# Altium PCB HS0038_BOARD.PcbDoc
Units mm, origin at the board's own origin, x right, y up, seen from the top; angles counter-clockwise.
Board outline 85 x 85 mm, 2 copper layers (Top Layer, Bottom Layer); 57 components, 50 nets, 262 pads, 40 vias.
Unrouted connection lines stored in the file: 1.
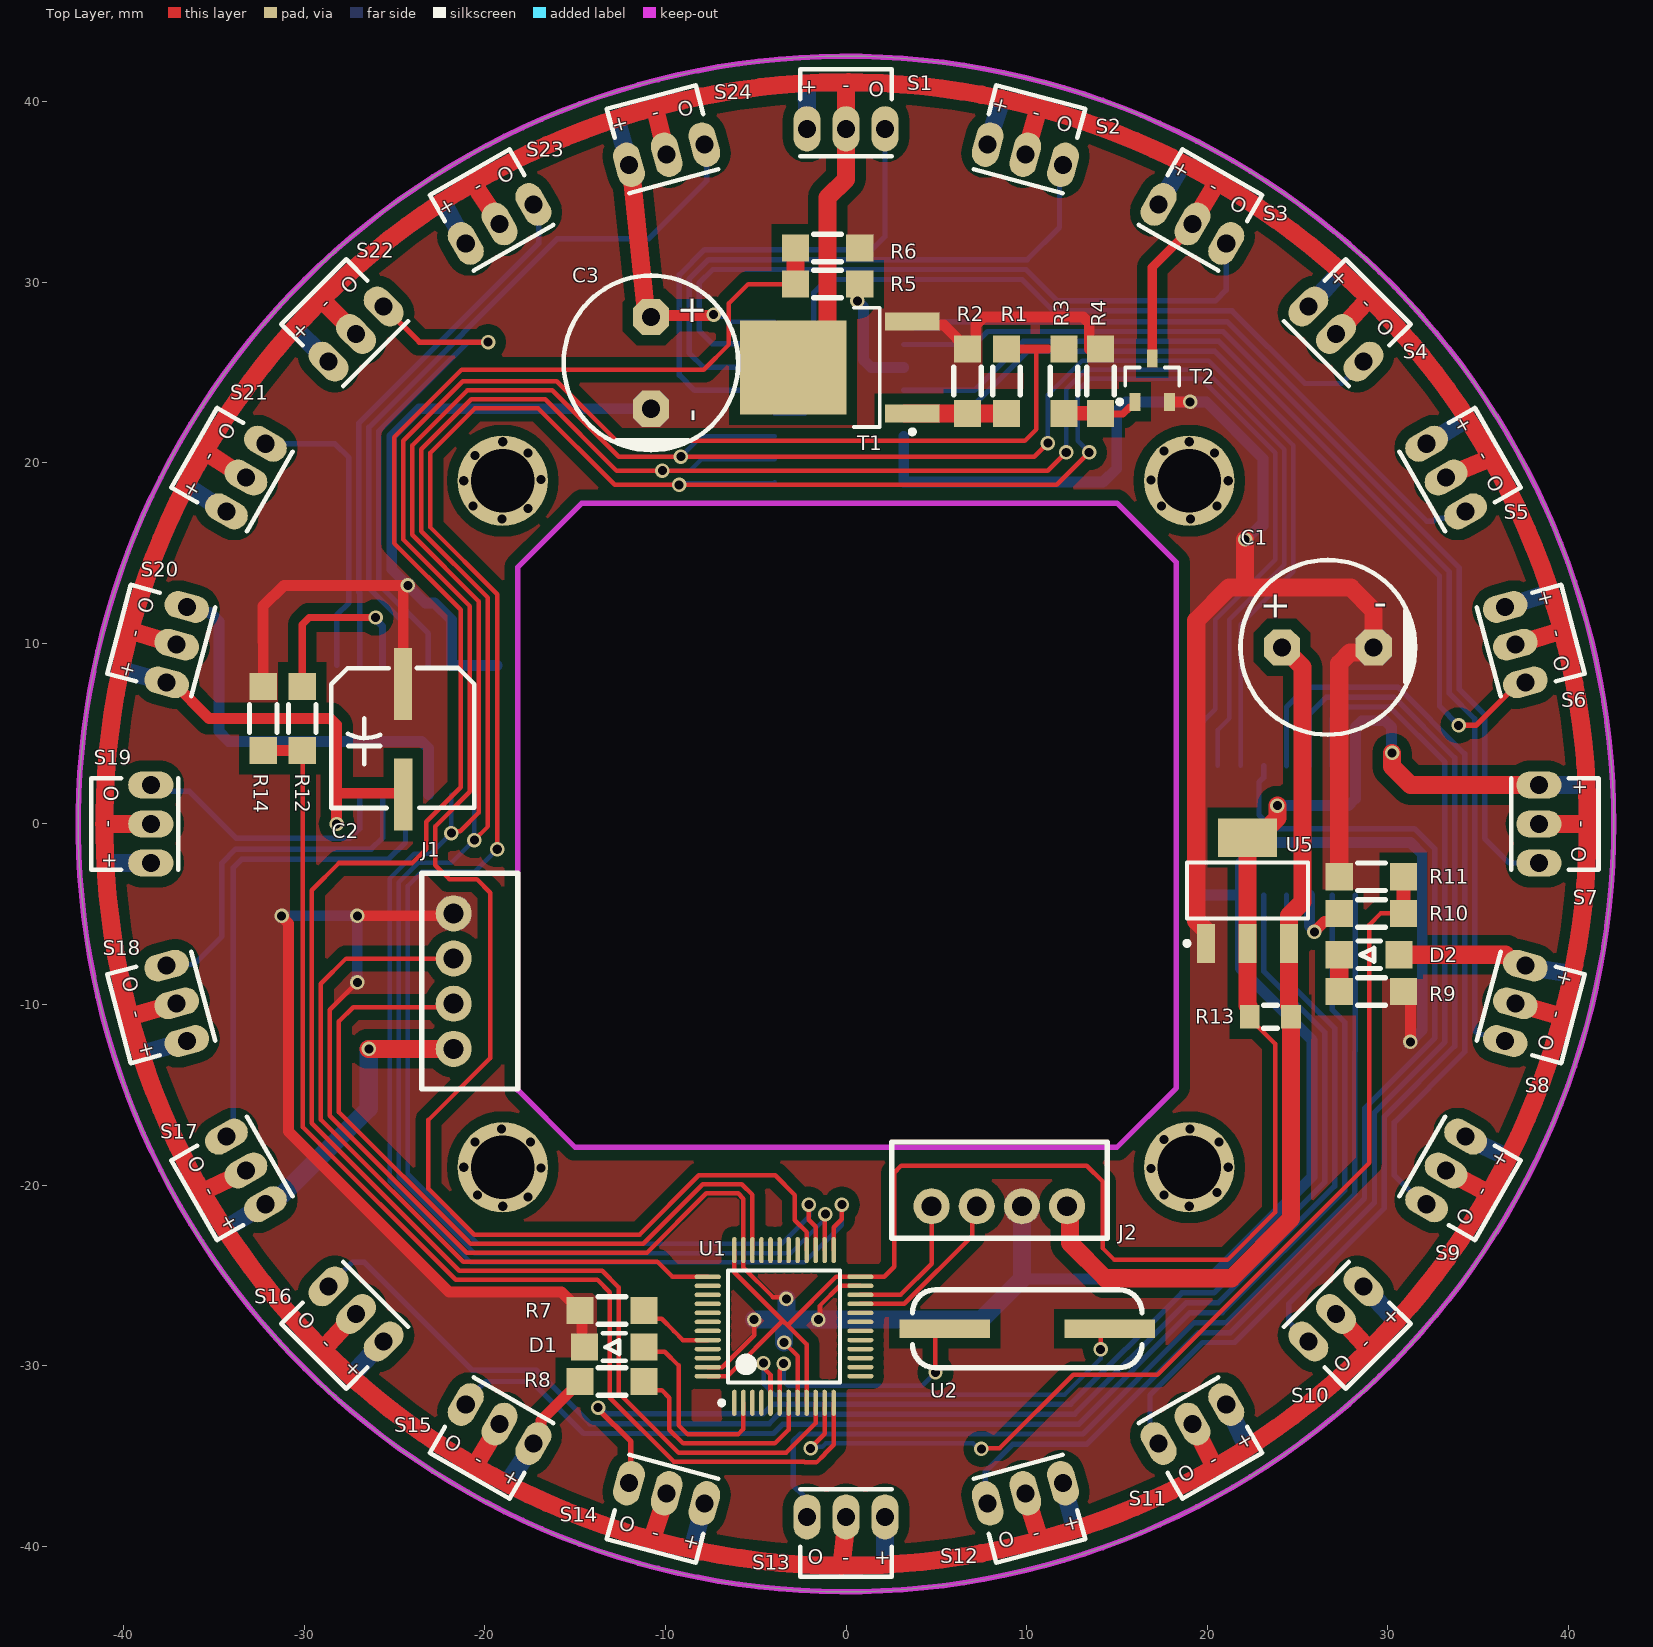
[diagram p0: Top Layer view]
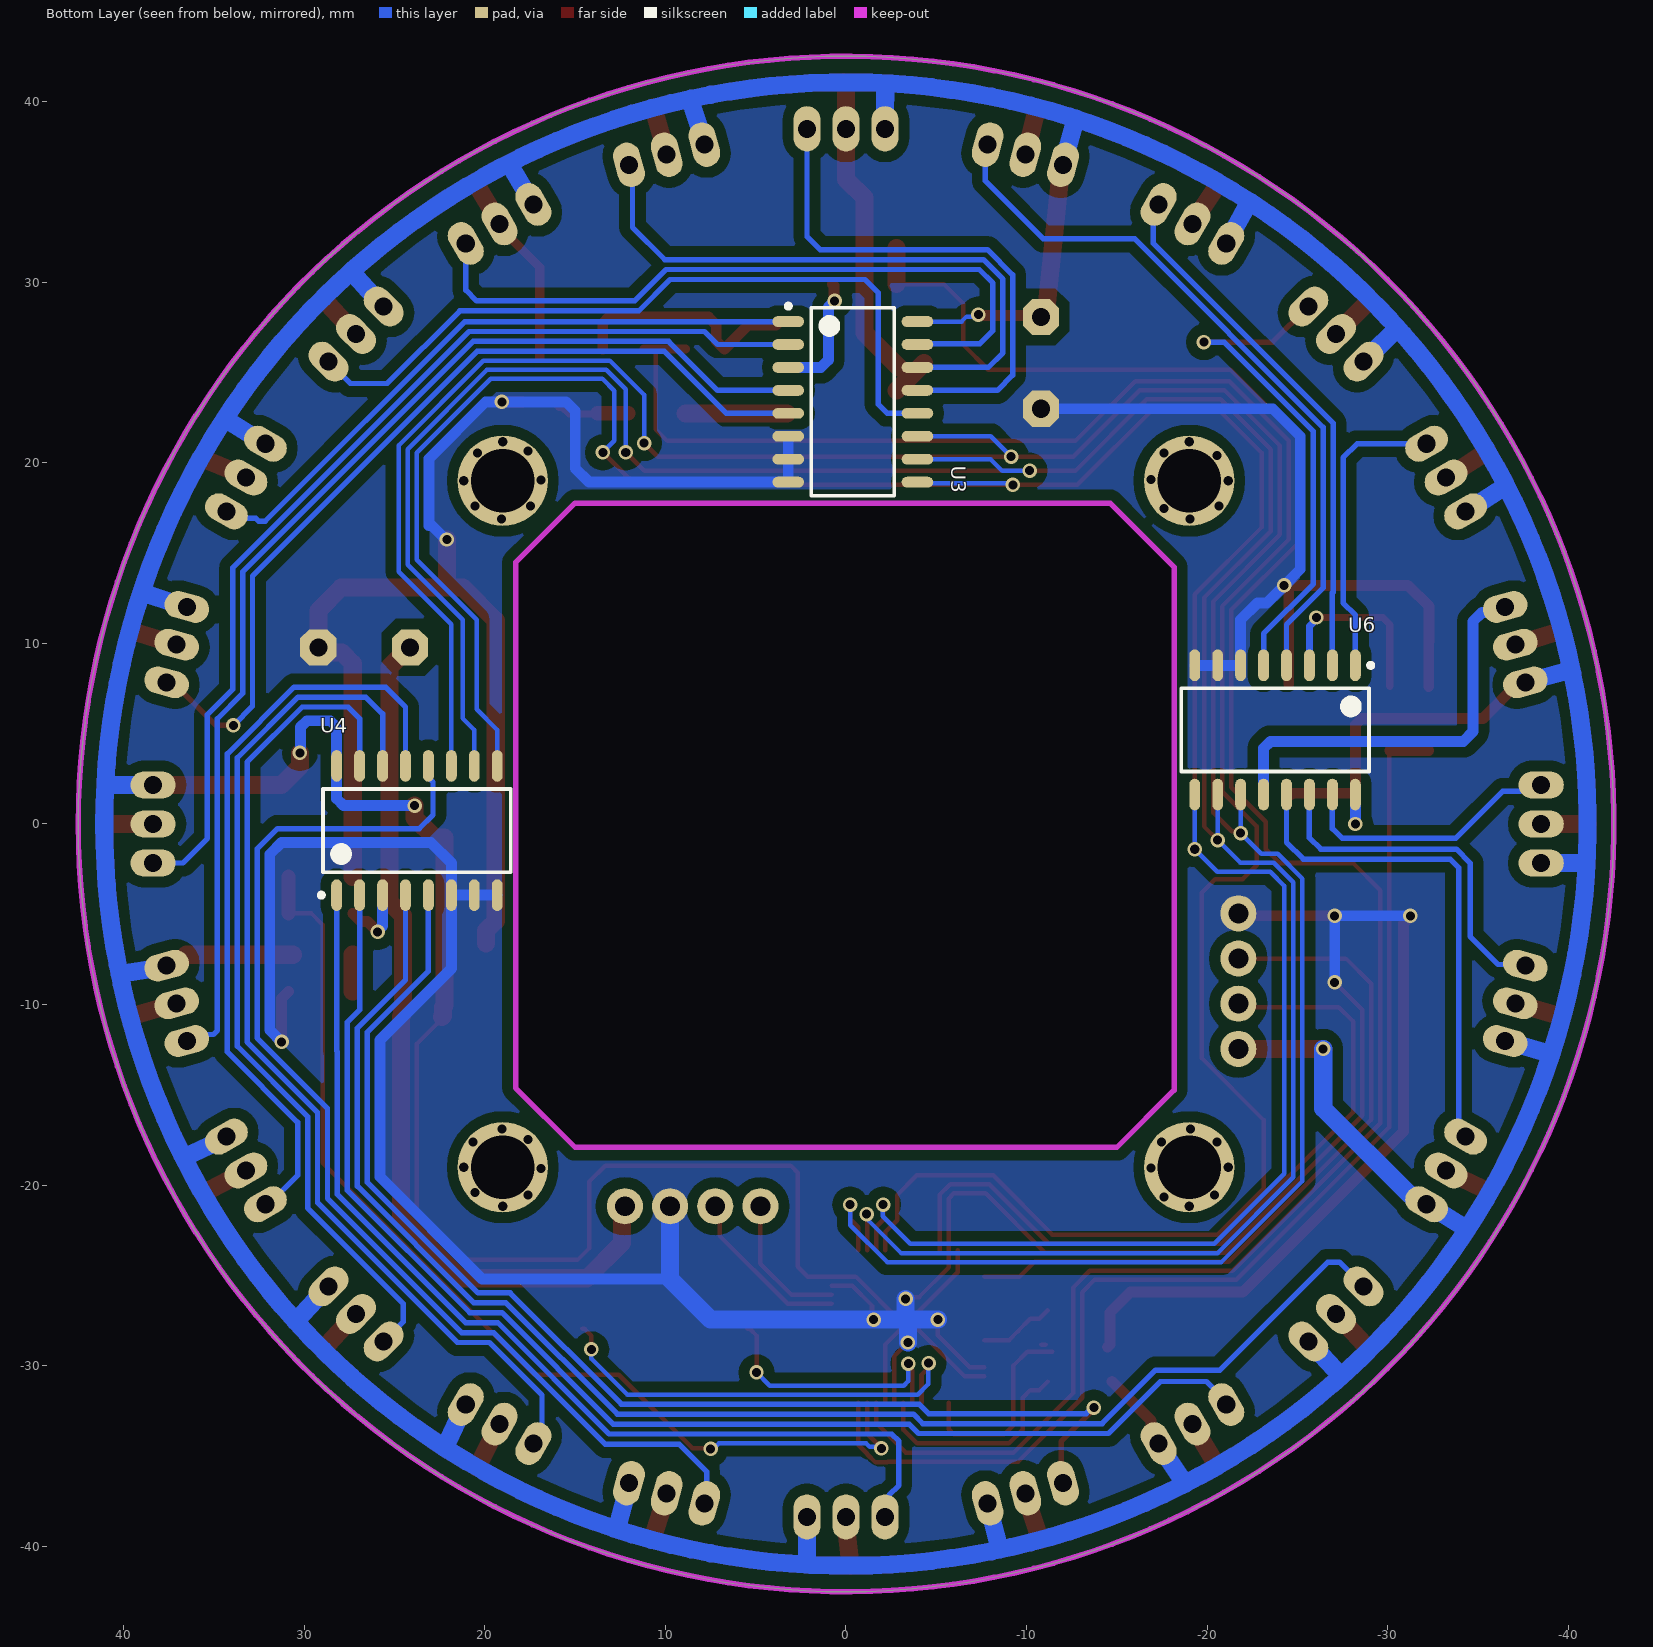
[diagram p1: Bottom Layer view, seen from below]
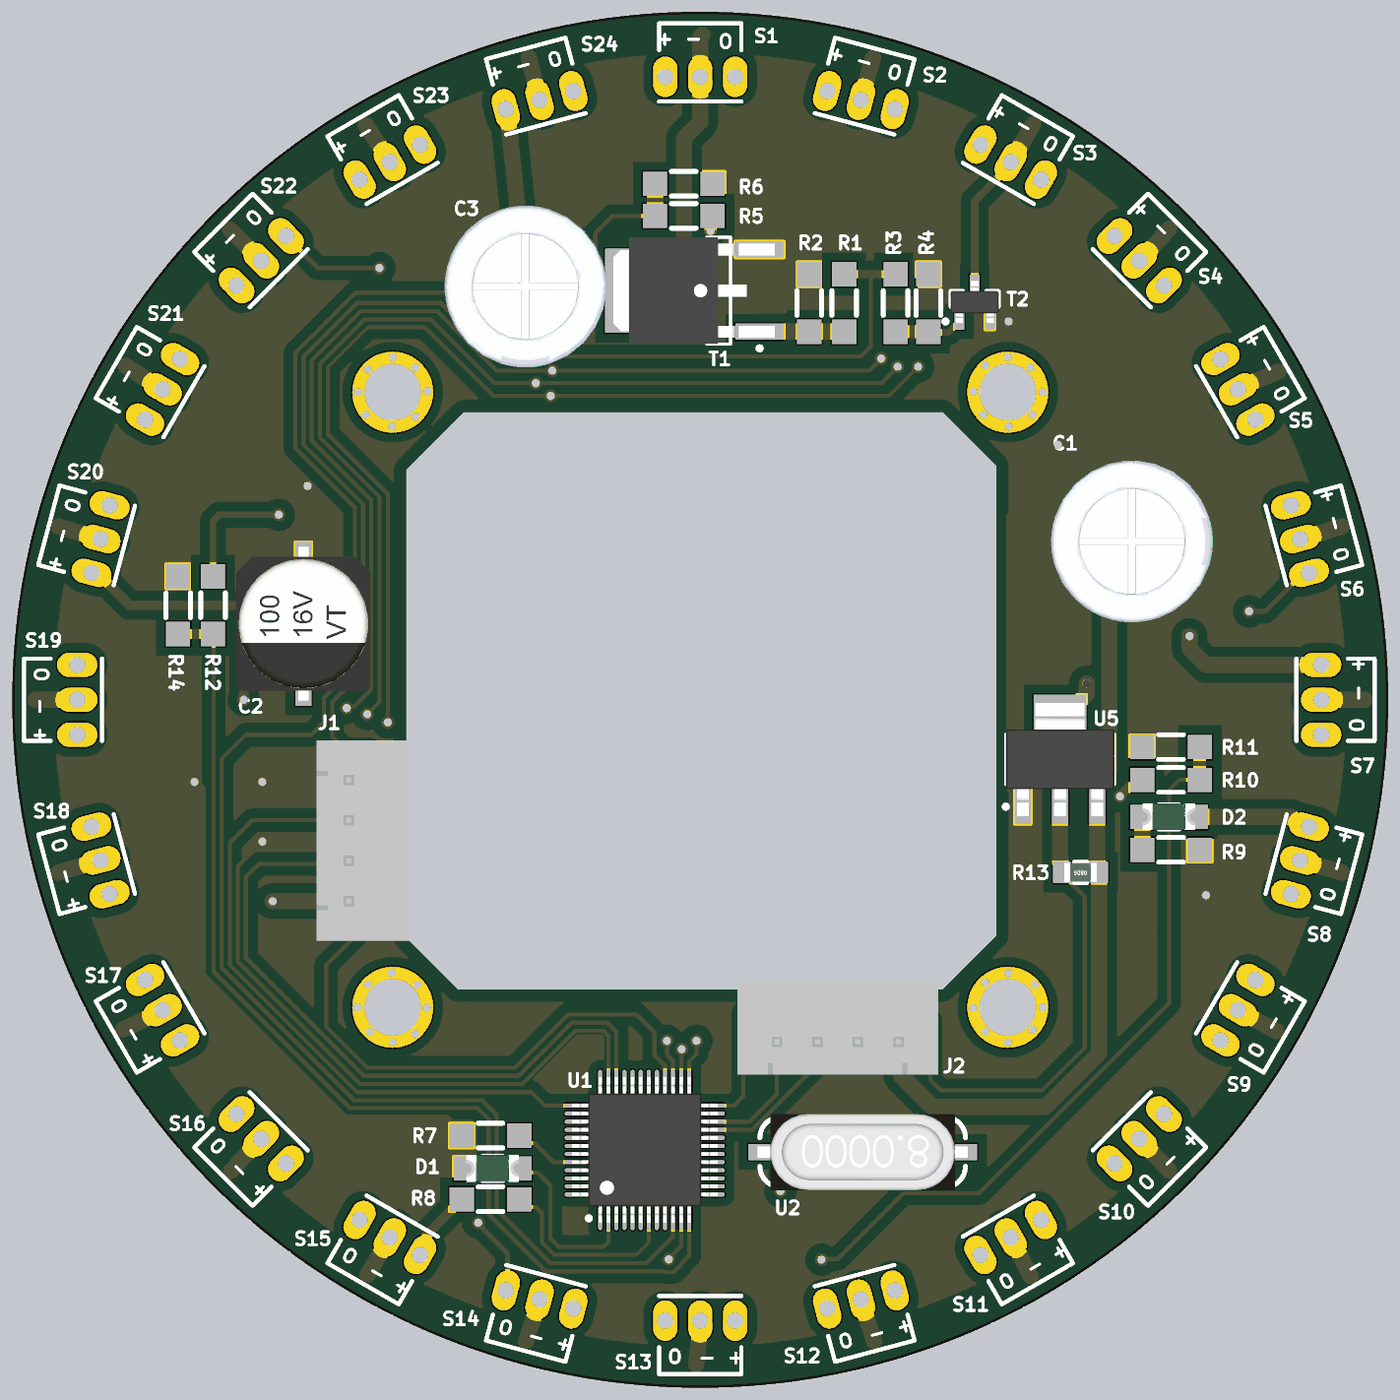
[diagram p2: 3D render of the assembled board from above, using the file's embedded part models]
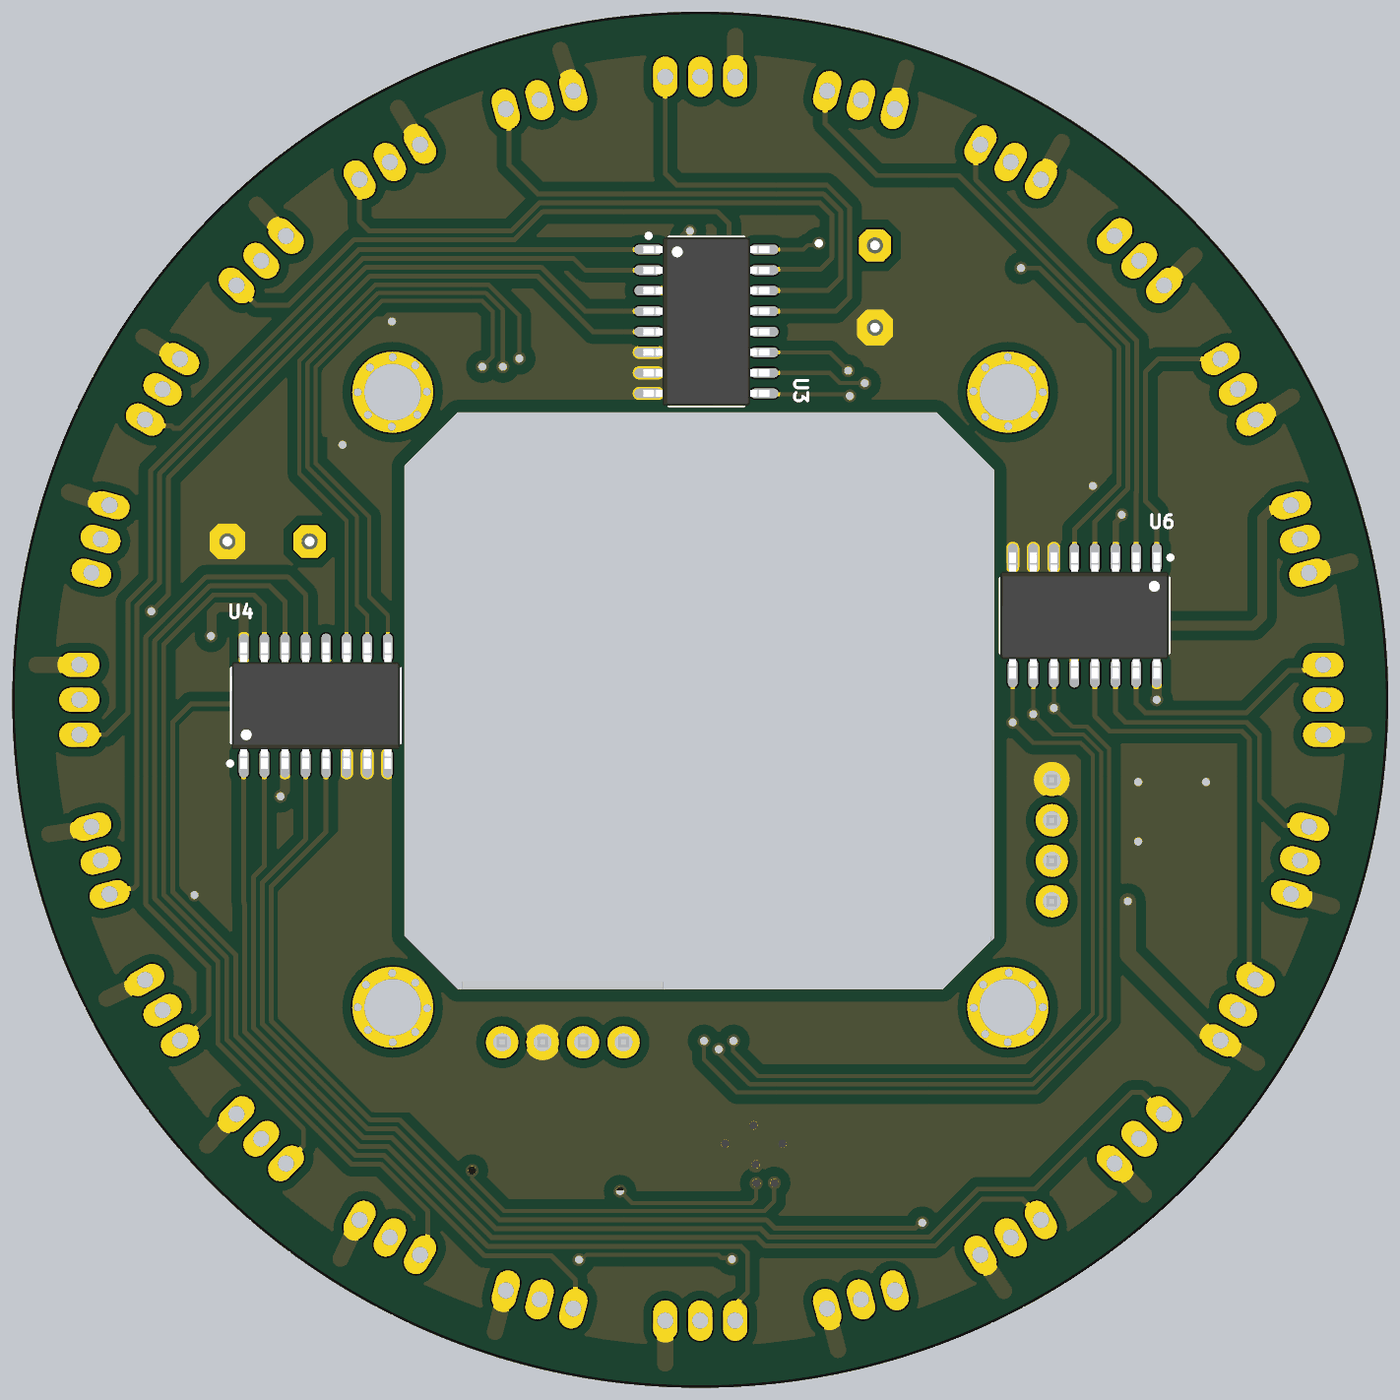
[diagram p3: 3D render of the assembled board from below, using the file's embedded part models]

## Layer stack, top to bottom
Top Solder: solder mask 0.0102, Solder Resist, Dk 3.5
Top Layer: signal copper 0.0356
Dielectric 1: dielectric 0.32, FR-4, Dk 4.8
Bottom Layer: signal copper 0.0356
Bottom Solder: solder mask 0.0102, Solder Resist, Dk 3.5

## Board outline
-42.5,0 ccw(c0,0) 0,-42.5 ccw(c0,0) 42.5,0 ccw(c0,0) 0,42.5 ccw(c0,0)
cut-out: -18.161,-14.732 -15,-17.893 15,-17.893 17.893,-15 18.288,-14.605 18.288,14.478 17.766,15 15,17.766 -14.619,17.766 -18.161,14.224

## Design rules (kind name [scope] priority, off if disabled: settings)
Clearance [All] p1: gap=0.6 ignorepadtopadclearanceinfootprint=FALSE except(0: Arc-Hole Track-Hole SMDPad-Hole THPad-Hole Via-Hole Fill-Hole Poly-Hole Region-Hole Text-Hole; 0.25: Arc-Arc Arc-Track Arc-SMDPad Arc-Via Track-Track Track-SMDPad Track-Via SMDPad-SMDPad SMDPad-Via THPad-Via Via-Via; 0.254: Arc-THPad Arc-Text Track-THPad Track-Text SMDPad-THPad SMDPad-Text THPad-THPad THPad-Text Via-Text Fill-Text Poly-Text Region-Text Text-Text)
PlaneConnect [All] p1: planeconnectstyle=Direct reliefexpansion=0.508 reliefentries=4 reliefconductorwidth=0.254 reliefairgap=0.254
PolygonConnect [All] p1: connectstyle=Direct reliefconductorwidth=0.254 reliefentries=4 polygonreliefangle="90 Angle" airgapwidth=0.254
RoutingVias [All] p1: holewidth=0.5 width=0.8 viastyle="Through Hole" minholewidth=0.5 minwidth=0.8 maxholewidth=0.6 maxwidth=1
SolderMaskExpansion [All] p1: expansion=0.102 istentingtop=FALSE
Width [All] p1: maxlimit=10 minlimit=0.25 preferedwidth=0.3
29 further rules are at their usual default settings.

## Classes and differential pairs
component class HS0038_BOARD: U6

## Components (designator, comment, footprint, x,y, rotation, side; value= is the part's Value field where it differs from the comment)
C1 "1000uF" "CAP 5x10x13 black" 26.67,9.779 r180 top
C2 "CAP" "CAP SMD 100uF 16V" -24.511,4.699 r270 top
C3 "1000uF" "CAP 5x10x13 black" -10.795,25.527 r90 top
D1 "LED" "LED GREEN 1206" -12.827,-28.956 r180 top
D2 "LED" "LED GREEN 1206" 28.956,-7.239 r180 top
J1 "XH4" "XH 4PIN" -20.828,-8.699 r270 top
J2 "XH4" "XH 4PIN" 8.492,-20.27 r0 top
R1 "RES" RES1206 8.89,24.511 r90 top
R2 "RES" RES1206 6.731,24.511 r90 top
R3 "RES" RES1206 12.065,24.511 r90 top
R4 "RES" RES1206 14.097,24.511 r90 top
R5 "RES" RES1206 -1.016,29.885 r0 top
R6 "RES" RES1206 -1.016,31.877 r180 top
R7 "RES" RES1206 -12.954,-26.924 r0 top
R8 "RES" RES1206 -12.954,-30.861 r0 top
R9 "RES" RES1206 29.083,-9.271 r0 top
R10 "RES" RES1206 29.083,-4.953 r180 top
R11 "RES" RES1206 29.083,-2.921 r0 top
R12 "RES" RES1206 -30.099,5.842 r90 top
R13 "RES" RES805 23.495,-10.668 r180 top
R14 "RES" RES1206 -32.258,5.842 r270 top
S1 "TSOP" TSOP 0,38.481 r180 top locked
S2 "TSOP" TSOP 9.927,37.047 r165 top locked
S3 "TSOP" TSOP 19.177,33.216 r150 top locked
S4 "TSOP" TSOP 27.121,27.121 r135 top locked
S5 "TSOP" TSOP 33.216,19.177 r120 top locked
S6 "TSOP" TSOP 37.047,9.927 r105 top locked
S7 "TSOP" TSOP 38.354,0 r90 top locked
S8 "TSOP" TSOP 37.047,-9.927 r75 top locked
S9 "TSOP" TSOP 33.216,-19.177 r60 top locked
S10 "TSOP" TSOP 27.121,-27.121 r45 top locked
S11 "TSOP" TSOP 19.177,-33.216 r30 top locked
S12 "TSOP" TSOP 9.927,-37.047 r15 top locked
S13 "TSOP" TSOP 0,-38.354 r0 top locked
S14 "TSOP" TSOP -9.927,-37.047 r345 top locked
S15 "TSOP" TSOP -19.177,-33.216 r330 top locked
S16 "TSOP" TSOP -27.121,-27.121 r315 top locked
S17 "TSOP" TSOP -33.216,-19.177 r300 top locked
S18 "TSOP" TSOP -37.047,-9.927 r285 top locked
S19 "TSOP" TSOP -38.481,0 r270 top locked
S20 "TSOP" TSOP -37.047,9.927 r255 top locked
S21 "TSOP" TSOP -33.216,19.177 r240 top locked
S22 "TSOP" TSOP -27.121,27.121 r225 top locked
S23 "TSOP" TSOP -19.177,33.216 r210 top locked
S24 "TSOP" TSOP -9.927,37.047 r195 top locked
T1 "FDD" FDD6690A -0.381,25.273 r180 top
T2 "AO3400A" AO3400A 16.952,24.568 r90 top
U1 "STM32F103C8T6" STM32F103C8T6 -3.429,-27.813 r90 top
U2 "Oscilator" "Crystal Oscilator" 10.033,-27.94 r180 top
U3 "MUX8" "4051 SMD" -0.381,23.368 r180 bottom
U4 "MUX8" "4051 SMD" 23.749,-0.362 r90 bottom
U5 "1117" AMS1117 22.225,-3.683 r90 top
U6 "MUX8" "4051 MUX8" -23.749,5.207 r270 bottom
? "Comment" SCREW -19,-19 r90 top
? "Comment" SCREW 19,-19 r180 top
? "Comment" SCREW 19,19 r270 top
? "Comment" SCREW -19,19 r0 top

## Footprints (in the part's own frame and the unit in brackets; to place one, negate y for a bottom-side part, rotate by r counter-clockwise, add the part's x,y. Pads: shape width x height; smd on the part's side, far side on the other; paste and mask are expansions set on the pad)
"4051 MUX8" [mm] "SOP, 16-Leads, Body 10.20x5.30mm, Pitch 1.27mm, IPC Medium Density"
  oval 1.75x0.6 smd: 1(-3.575,4.445) 2(-3.575,3.175) 3(-3.575,1.905) 4(-3.575,0.635) 5(-3.575,-0.635) 6(-3.575,-1.905) 7(-3.575,-3.175) 8(-3.575,-4.445) 9(3.575,-4.445) 10(3.575,-3.175) 11(3.575,-1.905) 12(3.575,-0.635) 13(3.575,0.635) 14(3.575,1.905) 15(3.575,3.175) 16(3.575,4.445)
  silkscreen extent -3.7,-5.2 2.3,5.42, body extent -3.9,-5.2 3.9,5.2, height 2
"4051 SMD" [mm] "SOP, 16-Leads, Body 10.20x5.30mm, Pitch 1.27mm, IPC Medium Density"
  oval 1.75x0.6 smd: 1(-3.575,4.445) 2(-3.575,3.175) 3(-3.575,1.905) 4(-3.575,0.635) 5(-3.575,-0.635) 6(-3.575,-1.905) 7(-3.575,-3.175) 8(-3.575,-4.445) 9(3.575,-4.445) 10(3.575,-3.175) 11(3.575,-1.905) 12(3.575,-0.635) 13(3.575,0.635) 14(3.575,1.905) 15(3.575,3.175) 16(3.575,4.445)
  silkscreen extent -3.7,-5.2 2.3,5.42, body extent -3.9,-5.2 3.9,5.2, height 2
AMS1117 [mm] "SOT223, 4-Leads, Body 6.30x7.00mm (avg), Pitch 2.30mm, IPC Medium Density"
  rect 2.15x1 smd: 1(-2.925,2.3) 2(-2.925,0) 3(-2.925,-2.3)
  rect 2.15x3.25 smd: 4(2.925,0)
  silkscreen extent -3.05,-3.35 1.55,3.47, body extent -3.5,-3.35 3.5,3.35, height 1.65
AO3400A [mm] "SOT23, 3-Leads, Body 2.90x2.45mm, Pitch 0.95mm, IPC Medium Density"
  rect 1x0.6 smd: 1(-1.2,0.95) 2(-1.2,-0.95) 3(1.2,0)
  silkscreen extent -1.32,-1.5 0.7,1.92, body extent -1.3,-1.5 1.3,1.5, height 1.1
"CAP 5x10x13 black" [mm]
  oct 2x2 hole 1: 1(-2.54,0) 2(2.54,0)
  silkscreen extent -4.83,-4.83 4.83,4.83, body extent -5,-5 5,5, height 13.1
"CAP SMD 100uF 16V" [mm]
  rect 4x1 smd: 1(-3.048,0) 2(3.07,0.003)
  silkscreen extent -3.94,-3.97 3.81,3.94, body extent -4.75,-4.15 4.75,4.15, height 10.51
"Crystal Oscilator" [mm]
  rect 5x1 smd: 1(-4.572,0) 2(4.572,0)
  silkscreen extent -6.35,-2.16 6.35,2.16, body extent -6.5,-2.35 6.5,2.35, height 4.21
FDD6690A [mm] "D-PAK, 3-Pads, Body 5.85x6.66mm (max), IPC Medium Density"
  rect 3x1 smd: 1(-4.05,2.54) 3(-4.05,-2.54)
  rect 5.9x5.2 smd: 4(2.55,0)
  silkscreen extent -4.18,-3.3 -0.8,3.69, body extent -5,-3.3 5,3.3, height 3.03
"LED GREEN 1206" [mm]
  rect 1.5x1.5 smd: 1(-1.651,0) 2(1.651,0)
  silkscreen extent -0.64,-0.76 0.64,0.76, body extent -1.63,-0.83 1.64,0.82, height 0.9
RES805 [mm]
  rect 1.1x1.3 smd: 1(-1.143,0) 2(1.143,0)
  silkscreen extent -0.39,-0.64 0.38,0.64, body extent -1,-0.6 1,0.6, height 0.48
RES1206 [mm]
  rect 1.5x1.5 smd: 1(-1.778,0) 2(1.778,0)
  silkscreen extent -0.76,-0.76 0.76,0.76, body extent -1.58,-0.82 1.58,0.82, height 0.53
SCREW [mm]
  round 5 hole 3.5: 1(0,0)
  round 0 hole 0.5: ""(-2.159,0) ""(-1.651,-1.397) ""(-1.524,1.397) ""(-0.031,-2.11) ""(0,2.159) ""(1.397,1.524) ""(1.397,-1.524) ""(2.128,0.059)
STM32F103C8T6 [mm] "TSQFP, 48-Leads, Body 7.00x7.00mm, Pitch 0.50mm, IPC Medium Density"
  oval 1.45x0.25 smd: 1(-4.225,2.75) 2(-4.225,2.25) 3(-4.225,1.75) 4(-4.225,1.25) 5(-4.225,0.75) 6(-4.225,0.25) 7(-4.225,-0.25) 8(-4.225,-0.75) 9(-4.225,-1.25) 10(-4.225,-1.75) 11(-4.225,-2.25) 12(-4.225,-2.75) 25(4.225,-2.75) 26(4.225,-2.25) 27(4.225,-1.75) 28(4.225,-1.25) 29(4.225,-0.75) 30(4.225,-0.25) 31(4.225,0.25) 32(4.225,0.75) 33(4.225,1.25) 34(4.225,1.75) 35(4.225,2.25) 36(4.225,2.752)
  oval 0.25x1.45 smd: 13(-2.75,-4.225) 14(-2.25,-4.225) 15(-1.75,-4.225) 16(-1.25,-4.225) 17(-0.75,-4.225) 18(-0.25,-4.225) 19(0.25,-4.225) 20(0.75,-4.225) 21(1.25,-4.225) 22(1.75,-4.225) 23(2.25,-4.225) 24(2.75,-4.225) 37(2.75,4.225) 38(2.25,4.225) 39(1.75,4.225) 40(1.25,4.225) 41(0.75,4.225) 42(0.25,4.225) 43(-0.25,4.225) 44(-0.75,4.225) 45(-1.25,4.225) 46(-1.75,4.225) 47(-2.25,4.225) 48(-2.75,4.225)
  silkscreen extent -4.35,-3.1 3.1,3.57, body extent -4.5,-4.5 4.5,4.5, height 1.6
TSOP [mm]
  oval 1.5x2.5 hole 1: 1(-2.159,0) 2(0,0) 3(2.159,0)
  silkscreen extent -2.54,-3.3 2.54,1.52, body extent -2.54,-3.4 2.54,1.4, height 11
"XH 4PIN" [mm]
  round 2 hole 1.1: 1(-3.753,-0.889) 2(-1.253,-0.889) 3(1.247,-0.889) 4(3.747,-0.889)
  silkscreen extent -5.97,-2.67 5.97,2.67, body extent -6.2,-2.88 6.2,2.88, height 7

## Part data
C1 C3: library part "Cap Electrolyte", "CAP DIP"
C2: library part "CAP Electrolit SMD", "Capacitor Electrolit SMD"
D1 D2: library part "LED SMD 1206", "LED SMD 1206"
J1 J2: library part "XH 4PIN", "XH Connector 4pins"
R1 R2 R3 R4 R5 R6 R7 R8 R9 R10 R11 R12 R14: library part RES1206, "RESISTOR SMD"
R13: library part RES805, "RESISTOR SMD"
S1 S2 S3 S4 S5 S6 S7 S8 S9 S10 S11 S12 S13 S14 S15 S16 S17 S18 S19 S20 S21 S22 S23 S24: "IR Sensor"
T1: library part FDD6690A, "FDD6690A MOSFET N-Chanel"
U1: "STM32F103C8T6 / LQFP48"
U2: library part Crystal, "Crystal Oscilator 8MHz"
U3 U4: library part 4051, "MULTIPLEXER 8 BIT"
U5: library part AMS1117, "3.3v Regulator"
U6: library part "4051 MUX8", "8Bit multiplexer/demultiplexer"

## Via types
v1: diameter 0.8, hole 0.5, Top Layer to Bottom Layer, tented both sides, 40 vias

## Nets (pads, with @x,y where several pads share a name; then routed paths per layer and width w, separated by ;. In a path a pad name is that pad's centre, name@x,y a point inside that pad or via, vN(x,y) a via of type N, cw(c..) or ccw(c..) an arc to the next point about the centre after c; other vN are vias at no path point)
+5: C1.2 J2.4 R13.1 U5.3 | length 49
  Top Layer w1: J2.4 12.405,-21.325 12.405,-23.2 14.351,-25.146 21.336,-25.146 24.638,-21.844 R13.1 24.588,-10.618 24.588,-10.125 24.525,-10.062 24.525,-5.066 25.273,-4.318 25.273,8.693 24.187,9.779 C1.2
A: U1.27 U3.9 U4.9 U6.9 | length 157.1
  Top Layer w0.25: v1(-19.304,-1.397) -19.304,12.717 -23.003,16.416 -23.003,20.541 -20.541,23.003 -17.034,23.003 -12.801,18.77 v1(-9.239,18.77) 11.658,18.77 v1(13.462,20.574) ; v1(-2.055,-21.069) -2.055,-21.915 -1.679,-22.291 U1.27
  Bottom Layer w0.25: U6.9 v1(-19.304,-1.397) -20.558,-2.651 -23.479,-2.651 -24.257,-3.429 -24.257,-19.359 -20.375,-23.241 -3.556,-23.241 -2.032,-21.717 -2.032,-21.092 v1(-2.055,-21.069) ; v1(-9.239,18.77) -9.15,18.86 -4.02,18.86 U3.9 ; v1(13.462,20.574) 12.819,21.217 12.819,23.978 13.479,24.638 19.668,24.638 23.765,20.541 23.765,14.621 20.447,11.303 20.447,6.35 19.304,5.207 U4.9
ADC0: R5.1 R6.2 U1.10 | length 115
  Top Layer w0.25: R5.1 -5.421,29.885 -6.477,28.829 -6.477,26.543 -7.874,25.146 -21.281,25.146 -25.019,21.408 -25.019,15.549 -21.328,11.858 -21.328,2.04 -23.241,0.127 -23.241,-1.397 -24.003,-2.159 -28.067,-2.159 -29.567,-3.659 -29.567,-16.568 -21.402,-24.733 -13.494,-24.733 -12.573,-25.654 -12.573,-31.496 -9.271,-34.798 -3.317,-34.798 -1.679,-33.16 U1.10
  Top Layer w1: R5.1 R6.2
ADC1: R10.1 R11.2 U1.11 | length 57.9
  Top Layer w0.25: v1(-1.954,-34.565) -1.954,-34.531 -1.179,-33.756 U1.11 ; v1(7.493,-34.59) 7.539,-34.544 8.509,-34.544 12.573,-30.48 17.239,-30.48 28.956,-18.763 28.956,-5.588 29.591,-4.953 R10.1
  Top Layer w0.8: R10.1 R11.2
  Bottom Layer w0.25: v1(-1.954,-34.565) -1.871,-34.482 -1.313,-34.482 -1.121,-34.29 7.044,-34.29 7.344,-34.59 v1(7.493,-34.59)
ADC2: R12.1 R14.2 U1.12 | length 66.3
  Top Layer w0.25: R12.1 -30.067,4.032 -30.067,-16.776 -21.61,-25.233 -13.756,-25.233 -13.073,-25.916 -13.073,-31.758 -9.525,-35.306 -2.309,-35.306 -2.275,-35.34 -1.633,-35.34 -1.179,-34.886 -1.179,-34.852 -0.679,-34.352 U1.12
  Top Layer w0.6: R14.2 R12.1
B: U1.26 U3.10 U4.10 U6.10 | length 158.1
  Top Layer w0.25: v1(-20.574,-0.889) -19.82,-0.135 -19.82,12.526 -23.503,16.209 -23.503,20.748 -20.748,23.503 -16.645,23.503 -12.7,19.558 v1(-10.16,19.558) 11.176,19.558 v1(12.192,20.574) ; U1.26 -1.179,-21.626 v1(-1.143,-21.59)
  Bottom Layer w0.25: U6.10 v1(-20.574,-0.889) -21.836,-2.151 -23.686,-2.151 -24.765,-3.23 -24.765,-19.558 -20.574,-23.749 -3.048,-23.749 -1.248,-21.949 -1.248,-21.695 v1(-1.143,-21.59) ; v1(-10.16,19.558) -8.636,19.558 -8.001,20.193 U3.10 ; v1(12.192,20.574) 12.192,24.058 13.272,25.138 19.875,25.138 24.265,20.748 24.265,14.359 21.209,11.303 21.209,5.842 20.574,5.207 U4.10
BOOT0: R7.2 U1.44 | length 4.2
  Top Layer w0.25: R7.2 -10.705,-27.395 -10.197,-27.395 -9.525,-28.067 -9.029,-28.563 U1.44
C: U1.25 U3.11 U4.11 U6.11 | length 160.6
  Top Layer w0.25: v1(-21.844,-0.508) -21.739,-0.403 -21.358,-0.403 -20.32,0.635 -20.32,12.319 -24.003,16.002 -24.003,20.955 -20.955,24.003 -16.256,24.003 -12.586,20.333 10.427,20.333 v1(11.176,21.082) ; U1.25 -0.679,-22.327 -0.231,-21.879 v1(-0.231,-21.069)
  Bottom Layer w0.25: U6.11 v1(-21.844,-0.508) -22.987,-1.651 -23.893,-1.651 -25.265,-3.023 -25.265,-19.765 -20.781,-24.249 -2.278,-24.249 -0.231,-22.202 v1(-0.231,-21.069) ; v1(-9.144,20.333) -8.014,21.463 U3.11 ; v1(11.176,21.082) 11.176,23.749 13.065,25.638 20.082,25.638 24.765,20.955 24.765,13.97 21.844,11.049 U4.11
GND: C1.1 C2.1 C3.1 D1.2 J1.1 J2.3 R2.2 R4.2 R6.1 R7.1 R9.2 R11.1 R14.1 T1.3 T2.2 U1.8 U1.23 U1.35 U1.47 U3.6 U3.7 U3.8 U4.6 U4.7 U4.8 U5.1 U6.6 U6.7 U6.8 | length 332.8
  Top Layer w0.25: v1(-27.051,-8.763) -28.567,-10.279 -28.567,-16.154 -20.988,-23.733 -11.016,-23.733 -7.73,-20.447 -5.969,-20.447 -5.679,-20.737 -5.679,-24.547 -4.042,-26.184 -3.407,-26.184 v1(-3.302,-26.289) ; U1.47 -6.847,-30.063 -5.08,-28.296 v1(-5.08,-27.432) ; v1(-3.429,-28.702) -2.679,-29.452 U1.8 ; v1(-1.524,-27.432) -1.439,-27.347 -1.439,-26.657 -0.345,-25.563 U1.23
  Top Layer w0.6: R14.1 -32.258,10.062 -32.263,10.068 -32.263,12.06 -31.115,13.208 v1(-24.257,13.208) ; v1(-31.242,-5.08) -31.242,-5.134 -30.861,-5.515 -30.861,-17.018 -21.971,-25.908 -15.748,-25.908 R7.1 ; v1(-27.051,-5.08) -21.851,-5.08 J1.1 ; C2.1 v1@-24.511,12.9 ; R7.1@-14.668,-26.988 -14.605,-27.051 -14.605,-28.829 D1.2 ; T1.3 3.869,27.613 5.407,27.613 R2.2 7.181,26.739 7.181,27.628 7.62,28.067 13.111,28.067 13.462,27.716 R4.2@13.462,26.289 ; T2.2 v1(19.05,23.368) ; R9.2 31.242,-9.652 v1@31.242,-12.011
  Top Layer w1: U5.1 19.925,-5.902 19.388,-5.365 19.388,11.26 21.209,13.081 21.971,13.081 ; v1(22.098,15.748) 22.098,13.208 21.971,13.081 ; R11.1 27.305,8.891 27.9,9.486 28.917,9.486 C1.1 29.21,11.811 27.94,13.081 21.971,13.081
  Bottom Layer w0.6: v1(-31.242,-5.08) v1(-27.051,-5.08) v1(-27.051,-8.763) ; U6.8 U6.7 U6.6 -21.844,11.303 -22.777,12.236 -23.285,12.236 v1(-24.257,13.208) -25.146,14.097 -25.146,21.463 -23.622,22.987 C3.1 ; U3.6 U3.7 U3.8 14.224,18.923 14.986,19.685 14.986,22.86 15.494,23.368 v1(19.05,23.368) 19.939,23.368 23.09,20.217 23.09,16.51 22.914,16.51 22.152,15.748 v1(22.098,15.748) ; 9.739,-25.186 20.147,-25.186 25.803,-19.53 25.803,-11.96 21.844,-8.001 U4.6 ; U4.8 U4.7 U4.6 ; v1(31.242,-12.065) 31.897,-11.41 31.897,-1.671 31.242,-1.016 22.987,-1.016 21.844,-2.159 U4.6
  Bottom Layer w1: v1(-5.08,-27.432) -3.302,-27.432 ; v1(-3.429,-28.702) -3.429,-27.559 -3.302,-27.432 ; v1(-3.302,-26.289) -3.302,-27.432 ; J2.3 9.739,-25.186 7.493,-27.432 v1(-1.524,-27.432) -3.302,-27.432
NetD1_1: D1.1 U1.2 | length 11.4
  Top Layer w0.25: D1.1@-11.43,-29.21 -10.033,-29.21 -9.271,-29.972 -9.271,-33.274 -8.755,-33.79 -5.977,-33.79 -5.679,-33.492 U1.2 ; D1.1@-11.049,-28.829 D1.1@-10.795,-28.829
NetD2_2: D2.2 R9.1 | length 2
  Top Layer w1: R9.1 D2.2
NetR1_1: R1.1 R2.1 T1.1 | length 5.6
  Top Layer w1: T1.1@3.275,22.733 R1.1
NetR3_1: R3.1 R4.1 T2.1 | length 4
  Top Layer w0.4: R4.1@14.066,22.69 15.324,22.69 15.702,23.068 15.902,23.068 16.002,23.168 T2.1
  Top Layer w0.8: R3.1 R4.1@13.769,22.733
NetR5_2: R5.2 U3.3 | length 6.8
  Top Layer w0.6: v1(0.635,28.956) 0.673,28.994 0.673,29.796 R5.2
  Bottom Layer w0.6: v1(0.635,28.956) 0.978,28.613 0.978,25.692 1.397,25.273 U3.3
NetR10_2: R10.2 U4.3 | length 3.9
  Top Layer w0.6: v1@25.967,-5.931 26.495,-5.403 26.855,-5.403 R10.2
  Bottom Layer w0.6: U4.3 25.654,-5.64 25.929,-5.915 v1(25.929,-5.969)
NetR12_2: R12.2 U6.3 | length 10.5
  Top Layer w0.4: R12.2 -30.099,11.049 -29.718,11.43 v1(-26.035,11.43)
  Bottom Layer w0.4: v1(-26.035,11.43) -26.035,11.322 -25.654,10.941 U6.3
NetU1_5: U1.5 U2.1 | length 25.2
  Top Layer w0.25: v1(-4.572,-29.845) -4.595,-29.868 -4.595,-30.076 -4.179,-30.492 U1.5 ; v1(14.097,-29.083) 14.097,-28.315 14.472,-27.94 U2.1
  Bottom Layer w0.25: v1(-4.572,-29.845) -4.559,-29.858 -4.559,-31.001 -3.97,-31.59 12.098,-31.59 14.097,-29.591 v1(14.097,-29.083)
NetU1_6: U1.6 U2.2 | length 14.7
  Top Layer w0.25: U1.6 -3.679,-30.244 -3.454,-30.019 v1(-3.454,-29.87) ; v1(4.953,-30.353) 4.953,-28.315 5.328,-27.94 U2.2
  Bottom Layer w0.25: v1(-3.454,-29.87) -3.454,-30.836 -3.2,-31.09 4.216,-31.09 v1(4.953,-30.353)
NRST: R8.2 U1.7 | length 12.3
  Top Layer w0.25: R8.2 -10.705,-31.332 -10.197,-31.332 -9.779,-31.75 -9.779,-33.528 -9.017,-34.29 -3.937,-34.29 -3.179,-33.532 U1.7
S0: S1.1 U3.13 | length 29.4
  Bottom Layer w0.3: U3.13 -8.382,24.003 -9.228,24.849 -9.228,30.396 -7.832,31.792 1.439,31.792 2.159,32.512 S1.1
S1: S2.1 U3.14 | length 34.4
  Bottom Layer w0.3: U3.14 -7.874,25.273 -8.678,26.077 -8.678,30.168 -7.604,31.242 -3.81,31.242 10.033,31.242 11.819,33.028 11.819,36.295 S2.1
S2: S3.1 U3.15 | length 40.2
  Bottom Layer w0.3: U3.15 -4.005,26.592 -7.415,26.592 -8.128,27.305 -8.128,29.94 -7.376,30.692 9.964,30.692 11.7,28.956 20.447,28.956 21.047,29.556 S3.1
S3: S4.1 U3.12 | length 42.2
  Bottom Layer w0.3: U3.12 -2.286,22.733 -1.778,23.241 -1.778,29.417 -1.053,30.142 9.736,30.142 11.472,28.406 21.378,28.406 25.4,24.384 27.437,24.384 S4.1
S4: S5.1 U3.1 | length 35.9
  Bottom Layer w0.3: U3.1 21.098,27.813 32.147,16.764 32.512,16.764 32.662,16.914 33.902,16.914 S5.1
S5: S6.1 U3.5 | length 49.6
  Top Layer w0.3: v1(33.909,5.461) 34.872,5.461 37.253,7.841 S6.1
  Bottom Layer w0.3: U3.5 6.62,22.733 10.05,26.163 20.414,26.163 32.851,13.726 32.851,6.519 v1(33.909,5.461)
S6: S7.1 U3.2 | length 55.6
  Bottom Layer w0.3: U3.2 7.112,26.543 7.832,27.263 20.87,27.263 33.951,14.182 33.951,7.451 35.348,6.054 35.348,-0.804 36.703,-2.159 S7.1
S7: S8.1 U3.4 | length 64.5
  Bottom Layer w0.3: U3.4 7.112,24.003 9.822,26.713 20.642,26.713 33.401,13.954 33.401,7.223 34.798,5.826 34.798,-11.43 35.021,-11.653 36.13,-11.653 S8.1
S8: S9.1 U4.13 | length 42.5
  Bottom Layer w0.3: U4.13 24.384,6.477 25.484,7.577 30.555,7.577 34.247,3.885 34.247,-12.616 30.353,-16.51 30.353,-19.447 31.953,-21.047 S9.1
S9: S10.1 U4.14 | length 49.3
  Bottom Layer w0.3: S10.1 24.511,-27.564 24.511,-26.543 29.803,-21.251 29.803,-16.191 33.697,-12.297 33.697,3.657 30.327,7.027 26.585,7.027 25.654,6.096 U4.14
S10: S11.1 U4.15 | length 56.1
  Bottom Layer w0.3: S11.1 16.828,-33.816 16.828,-31.607 19.732,-28.702 21.51,-28.702 29.253,-20.959 29.253,-15.963 33.147,-12.069 33.147,3.429 30.099,6.477 27.559,6.477 26.924,5.842 U4.15
S11: S12.1 U4.12 | length 63.4
  Bottom Layer w0.3: S12.1 7.712,-37.477 7.712,-35.849 9.221,-34.34 13.317,-34.34 19.505,-28.152 21.283,-28.152 28.703,-20.732 28.703,-15.735 32.597,-11.841 32.597,-1.381 31.47,-0.254 23.622,-0.254 22.86,0.508 22.86,2.312 23.114,2.566 U4.12
S12: S13.1 U4.1 | length 57.8
  Bottom Layer w0.3: S13.1 -2.389,-38.125 -2.389,-37.141 -2.921,-36.608 -2.921,-34.163 -2.523,-33.765 13.114,-33.765 19.277,-27.602 21.055,-27.602 28.153,-20.504 28.153,-12.598 28.194,-12.557 U4.1
S13: S14.1 U4.5 | length 67.9
  Top Layer w0.3: v1(-13.716,-32.305) -13.716,-32.385 -11.91,-34.191 -11.91,-36.387 S14.1
  Bottom Layer w0.3: v1(-13.716,-32.305) -13.624,-32.305 -13.29,-32.639 -4.572,-32.639 -4.048,-32.115 12.43,-32.115 18.593,-25.952 20.371,-25.952 26.503,-19.82 26.503,-11.533 23.114,-8.144 U4.5
S14: S15.1 U4.2 | length 72.7
  Bottom Layer w0.3: S15.1 -21.047,-31.966 -19.942,-30.861 -17.399,-30.861 -14.521,-33.739 -4.021,-33.739 -3.497,-33.215 12.886,-33.215 19.049,-27.052 20.827,-27.052 27.603,-20.276 27.603,-10.966 26.924,-10.287 U4.2
S15: S16.1 U4.4 | length 82.6
  Bottom Layer w0.3: S16.1 -27.31,-24.257 -26.67,-24.257 -20.701,-30.226 -17.145,-30.226 -14.182,-33.189 -4.249,-33.189 -3.725,-32.665 12.658,-32.665 18.821,-26.502 20.599,-26.502 27.053,-20.048 27.053,-11.305 24.384,-8.636 U4.4
S16: S17.1 U6.13 | length 27.8
  Bottom Layer w0.3: S17.1 -33.909,-16.921 -33.909,-2.413 -33.443,-1.947 -25.315,-1.947 -24.384,-1.016 U6.13
S17: S18.1 U6.14 | length 19.7
  Bottom Layer w0.3: S18.1 -37.543,-7.778 -36.099,-7.778 -34.544,-6.223 -34.544,-2.159 -33.782,-1.397 -26.289,-1.397 -25.654,-0.762 U6.14
S18: S19.1 U6.15 | length 14.9
  Bottom Layer w0.3: S19.1 -37.656,2.159 -37.302,1.805 -36.349,1.805 -33.744,-0.8 -27.47,-0.8 -26.924,-0.254 U6.15
S19: S20.1 U6.12 | length 22.7
  Bottom Layer w0.6: S20.1 -36.187,11.711 -35.206,11.711 -34.713,11.218 -34.713,5.122 -34.163,4.572 -23.495,4.572 -23.114,4.191 U6.12
S20: S21.1 U6.1 | length 16.7
  Bottom Layer w0.3: S21.1 -28.286,21.047 -27.516,20.277 -27.516,12.235 -28.194,11.557 U6.1
S21: S22.1 U6.5 | length 28.8
  Top Layer w0.3: S22.1 -23.617,26.67 v1(-19.812,26.67)
  Bottom Layer w0.3: U6.5 -23.114,10.541 -25.866,13.293 -25.866,21.733 -20.929,26.67 v1(-19.812,26.67)
S22: S23.1 U6.2 | length 29.8
  Bottom Layer w0.3: U6.2 -26.924,12.795 -26.966,12.837 -26.966,22.189 -17.018,32.137 -17.018,34.006 S23.1
S23: S24.1 U6.4 | length 40.4
  Bottom Layer w0.3: U6.4 -24.384,11.033 -26.416,13.065 -26.416,21.961 -15.992,32.385 -10.922,32.385 -7.712,35.595 -7.712,37.477 S24.1
S_GND: S1.2 S2.2 S3.2 S4.2 S5.2 S6.2 S7.2 S8.2 S9.2 S10.2 S11.2 S12.2 S13.2 S14.2 S15.2 S16.2 S17.2 S18.2 S19.2 S20.2 S21.2 S22.2 S23.2 S24.2 T1.4 T2.3 | length 347.7
  Top Layer w0.5: T2.3 16.952,30.808 19.177,33.033 S3.2
  Top Layer w1: -41.058,0 S19.2 ; -39.646,-10.674 -37.53,-10.056 S18.2 ; -39.637,10.706 -37.53,10.056 S20.2 ; -35.648,-20.37 -33.649,-19.427 S17.2 ; -35.497,20.632 -33.649,19.427 S21.2 ; -29.032,29.032 S22.2 ; -28.968,-29.096 -27.474,-27.474 S16.2 ; -20.656,35.483 -19.427,33.649 S23.2 ; -20.561,-35.538 -19.427,-33.649 S15.2 ; -10.76,-39.623 -10.056,-37.53 S14.2 ; -10.587,39.669 -10.056,37.53 S24.2 ; T1.4@-4.325,25.524 T1.4@-2.804,24.003 ; T1.4 -1.016,27.188 -1.016,34.671 0,35.687 S1.2 0,40.93 0.128,41.058 ; -0.253,-41.057 0,-38.854 S13.2 ; S12.2 10.056,-37.53 10.738,-39.629 ; S2.2 10.056,37.53 10.674,39.646 ; S11.2 19.427,-33.649 20.411,-35.625 ; S3.2 19.427,33.649 20.561,35.538 ; S10.2 27.474,-27.474 28.969,-29.096 ; S4.2 27.474,27.474 28.969,29.096 ; S9.2 33.649,-19.427 35.593,-20.466 ; S5.2 33.649,19.427 35.71,20.261 ; S8.2 37.53,-10.056 39.646,-10.674 ; S6.2 37.53,10.056 39.637,10.706 ; S7.2 41.058,0 ; 41.058,0 ccw(c0,0) 41.058,0
SCL: J2.2 U1.21 | length 9.5
  Top Layer w0.25: U1.21 3.227,-26.563 6.985,-22.805 6.985,-21.413 J2.2
SDA: J2.1 U1.22 | length 7.8
  Top Layer w0.25: U1.22 3.02,-26.063 4.739,-24.344 J2.1
SENSOR_EN: R1.2 R3.2 U1.28 | length 118.4
  Top Layer w0.25: U1.28 -2.179,-22.586 -2.83,-21.935 -2.83,-20.538 -3.921,-19.447 -8.144,-19.447 -11.43,-22.733 -20.574,-22.733 -23.114,-20.193 -23.114,-16.383 -19.685,-12.954 -19.685,-3.81 -20.447,-3.048 -21.971,-3.048 -22.741,-2.278 -22.741,-0.135 -20.828,1.778 -20.828,12.065 -24.511,15.748 -24.511,21.209 -21.209,24.511 -16.002,24.511 -12.7,21.209 9.906,21.209 10.541,21.844 10.541,26.162
  Top Layer w0.5: R1.2 10.541,26.289 11.176,26.289
SWCLK: J1.2 U1.37 | length 40.5
  Top Layer w0.25: J1.2 -27.676,-7.446 -29.067,-8.837 -29.067,-16.361 -21.195,-24.233 -10.438,-24.233 -9.608,-25.063 U1.37
SWIO: J1.3 U1.34 | length 42.3
  Top Layer w0.25: J1.3 -21.909,-10.138 -27.283,-10.138 -28.067,-10.922 -28.067,-15.947 -21.027,-22.987 -20.781,-23.233 -11.223,-23.233 -7.937,-19.947 -6.342,-19.947 -5.762,-19.947 -5.179,-20.53 U1.34
VCC: C2.2 C3.2 D2.1 J1.4 R8.1 R13.2 S1.3 S2.3 S3.3 S4.3 S5.3 S6.3 S7.3 S8.3 S9.3 S10.3 S11.3 S12.3 S13.3 S14.3 S15.3 S16.3 S17.3 S18.3 S19.3 S20.3 S21.3 S22.3 S23.3 S24.3 U1.9 U1.24 U1.36 U1.48 U3.16 U4.16 U5.2 U5.4 U6.16 | length 486.1
  Top Layer w0.25: U1.48 -6.56,-30.563 -3.492,-27.495 ; U1.36 -6.181,-24.807 -3.492,-27.495 ; U1.9 -2.179,-28.809 -3.175,-27.813 ; R13.2 22.352,-10.768 23.749,-12.165 23.749,-21.496 21.115,-24.13 14.859,-24.13 14.224,-23.495 14.224,-19.812 13.335,-18.923 3.048,-18.923 2.667,-19.304 2.667,-24.511 2.115,-25.063 U1.24 -0.552,-25.063 -3.175,-27.686 -3.175,-27.813 ; -3.492,-27.495 -3.175,-27.813
  Top Layer w0.6: S20.3 -37.253,7.841 -35.253,5.842 -28.545,5.842 -28.194,5.491 -28.194,1.621 ; v1(-28.194,0) -28.194,1.621 ; C2.2 -24.632,1.629 -24.708,1.705 -28.11,1.705 -28.194,1.621 ; S15.3 -16.885,-33.873 -16.885,-33.014 R8.1 ; C3.2 -10.706,28.156 -7.366,28.156 v1(-7.328,28.194)
  Top Layer w1: v1(-26.416,-12.446) J1.4 ; S24.3 -11.883,36.006 -11.088,28.567 C3.2 ; R13.2 22.302,-10.618 22.302,-10.125 22.225,-10.048 U5.2 U5.4 22.775,-0.758 23.876,0.343 v1(23.876,1.016) ; v1(30.226,3.937) 30.226,3.175 31.242,2.159 S7.3 ; D2.1 36.515,-7.239 37.117,-7.841 S8.3
  Bottom Layer w0.25: v1(-7.328,28.194) -7.223,28.089 -6.673,28.089 -6.397,27.813 U3.16
  Bottom Layer w0.6: v1(-28.194,0) U6.16 ; v1(23.876,1.016) 27.813,1.016 28.194,1.397 U4.16 28.194,5.364 28.545,5.715 29.836,5.715 30.188,5.364 30.188,3.975 v1(30.226,3.937)
  Bottom Layer w1: -41.001,-2.158 -38.981,-2.159 S19.3 ; -40.159,8.542 -38.089,7.971 S20.3 ; -39.027,-12.754 -36.971,-12.142 S18.3 ; -36.542,18.72 -34.728,17.557 S21.3 ; -34.395,-22.421 -32.569,-21.297 S17.3 -31.818,-21.047 -31.318,-20.547 -31.215,-20.547 -26.416,-15.748 v1(-26.416,-12.446) ; -30.531,27.452 -29.001,25.947 S22.3 ; -27.41,-30.568 -25.947,-29.001 S16.3 ; -22.331,34.454 -21.297,32.569 S23.3 ; -18.766,-36.518 -17.557,-34.728 S15.3 ; -12.716,39.039 -12.142,36.971 S24.3 ; -8.516,-40.165 -7.971,-38.089 S14.3 ; -2.171,41 -2.159,38.981 S1.3 ; S13.3 2.159,-38.854 2.165,-41.001 ; S2.3 7.971,38.089 8.637,40.139 ; S12.3 12.142,-36.971 12.679,-39.051 ; S3.3 17.557,34.728 18.666,36.57 ; S11.3 21.297,-32.569 22.215,-34.529 ; S4.3 25.947,29.001 27.396,30.581 ; S10.3 29.001,-25.947 30.461,-27.529 ; S5.3 32.569,21.297 34.395,22.421 ; S9.3 34.728,-17.557 36.672,-18.464 ; S6.3 36.971,12.142 39.001,12.831 ; S8.3 38.089,-7.971 40.211,-8.297 ; S7.3 38.854,2.159 41.001,2.165 ; 41.058,0 ccw(c0,0) 41.058,0
pads on no net: ?. ?.1 U1.1 U1.3 U1.4 U1.13 U1.14 U1.15 U1.16 U1.17 U1.18 U1.19 U1.20 U1.29 U1.30 U1.31 U1.32 U1.33 U1.38 U1.39 U1.40 U1.41 U1.42 U1.43 U1.45 U1.46

## Polygon pours and split planes (outlines as drawn)
GND on Bottom Layer "GND_L02_P001" (solid, pour order 1): -42.5,0 ccw(c0,0) 0,-42.5 ccw(c0,0) 42.5,0 ccw(c0,0) 0,42.5 ccw(c0,0)
GND on Top Layer "GND_L01_P000" (solid, pour order 0): -42.5,0 ccw(c0,0) 0,-42.5 ccw(c0,0) 42.5,0 ccw(c0,0) 0,42.5 ccw(c0,0)

## Keep-outs
Keep-Out Layer:
  circle w0.3: c0,0 r42.5
  lines w0.3: -18.161,-14.732 -18.161,14.224 -14.619,17.766 15,17.766 18.288,14.478 18.288,-14.605 15,-17.893 -15,-17.893 -18.161,-14.732

## Silkscreen, mask and mechanical layers (free items; w line width, h text height)
Top Solder:
  circle w0.3: c0,0 r42.5
Bottom Solder:
  circle w0.3: c0,0 r42.5
Mechanical 1:
  circle w0.3: c0,0 r42.5
  lines w0.3: -18.161,-14.732 -18.161,14.224 -14.619,17.766 15,17.766 17.766,15 18.288,14.478 18.288,-14.605 17.893,-15 15,-17.893 -15,-17.893 -18.161,-14.732

## Text inside footprints (layer, text, board x,y; h text height)
C1: Top Overlay "-" at 29.972,12.7 h1.52 r180; Top Overlay "+" at 24.638,12.7 h1.52 r180
C3: Top Overlay "-" at -7.874,22.225 h1.52 r90; Top Overlay "+" at -7.874,27.559 h1.52 r90
S1: Top Overlay "+" at -1.577,41.101 h0.8 r180; Top Overlay "-" at 0.201,41.114 h0.8 r180; Top Overlay "O" at 2.106,41.095 h0.8 r180
S2: Top Overlay "+" at 9.082,39.986 h0.8 r165; Top Overlay "-" at 10.802,39.538 h0.8 r165; Top Overlay "O" at 12.638,39.027 h0.8 r165
S3: Top Overlay "+" at 19.122,36.273 h0.8 r150; Top Overlay "-" at 20.668,35.395 h0.8 r150; Top Overlay "O" at 22.308,34.426 h0.8 r150
S4: Top Overlay "+" at 27.858,30.088 h0.8 r135; Top Overlay "-" at 29.124,28.84 h0.8 r135; Top Overlay "O" at 30.458,27.48 h0.8 r135
S5: Top Overlay "+" at 34.696,21.853 h0.8 r120; Top Overlay "-" at 35.596,20.319 h0.8 r120; Top Overlay "O" at 36.533,18.66 h0.8 r120
S6: Top Overlay "+" at 39.17,12.128 h0.8 r105; Top Overlay "-" at 39.643,10.414 h0.8 r105; Top Overlay "O" at 40.117,8.569 h0.8 r105
S7: Top Overlay "+" at 40.974,1.577 h0.8 r90; Top Overlay "-" at 40.987,-0.201 h0.8 r90; Top Overlay "O" at 40.968,-2.106 h0.8 r90
S8: Top Overlay "+" at 39.986,-9.082 h0.8 r75; Top Overlay "-" at 39.538,-10.802 h0.8 r75; Top Overlay "O" at 39.027,-12.638 h0.8 r75
S9: Top Overlay "+" at 36.273,-19.122 h0.8 r60; Top Overlay "-" at 35.395,-20.668 h0.8 r60; Top Overlay "O" at 34.427,-22.308 h0.8 r60
S10: Top Overlay "+" at 30.088,-27.858 h0.8 r45; Top Overlay "-" at 28.84,-29.124 h0.8 r45; Top Overlay "O" at 27.48,-30.458 h0.8 r45
S11: Top Overlay "+" at 21.853,-34.696 h0.8 r30; Top Overlay "-" at 20.319,-35.596 h0.8 r30; Top Overlay "O" at 18.66,-36.533 h0.8 r30
S12: Top Overlay "+" at 12.128,-39.17 h0.8 r15; Top Overlay "-" at 10.414,-39.643 h0.8 r15; Top Overlay "O" at 8.569,-40.117 h0.8 r15
S13: Top Overlay "+" at 1.577,-40.975 h0.8; Top Overlay "-" at -0.201,-40.987 h0.8; Top Overlay "O" at -2.106,-40.968 h0.8
S14: Top Overlay "+" at -9.082,-39.986 h0.8 r345; Top Overlay "-" at -10.802,-39.538 h0.8 r345; Top Overlay "O" at -12.638,-39.027 h0.8 r345
S15: Top Overlay "+" at -19.122,-36.273 h0.8 r330; Top Overlay "-" at -20.668,-35.395 h0.8 r330; Top Overlay "O" at -22.308,-34.426 h0.8 r330
S16: Top Overlay "+" at -27.858,-30.088 h0.8 r315; Top Overlay "-" at -29.124,-28.84 h0.8 r315; Top Overlay "O" at -30.458,-27.48 h0.8 r315
S17: Top Overlay "+" at -34.696,-21.853 h0.8 r300; Top Overlay "-" at -35.596,-20.319 h0.8 r300; Top Overlay "O" at -36.533,-18.66 h0.8 r300
S18: Top Overlay "+" at -39.17,-12.128 h0.8 r285; Top Overlay "-" at -39.643,-10.414 h0.8 r285; Top Overlay "O" at -40.117,-8.569 h0.8 r285
S19: Top Overlay "+" at -41.101,-1.577 h0.8 r270; Top Overlay "-" at -41.114,0.201 h0.8 r270; Top Overlay "O" at -41.095,2.106 h0.8 r270
S20: Top Overlay "+" at -39.986,9.082 h0.8 r255; Top Overlay "-" at -39.538,10.802 h0.8 r255; Top Overlay "O" at -39.027,12.638 h0.8 r255
S21: Top Overlay "+" at -36.273,19.122 h0.8 r240; Top Overlay "-" at -35.395,20.668 h0.8 r240; Top Overlay "O" at -34.427,22.308 h0.8 r240
S22: Top Overlay "+" at -30.088,27.858 h0.8 r225; Top Overlay "-" at -28.84,29.124 h0.8 r225; Top Overlay "O" at -27.48,30.458 h0.8 r225
S23: Top Overlay "+" at -21.853,34.696 h0.8 r210; Top Overlay "-" at -20.319,35.596 h0.8 r210; Top Overlay "O" at -18.66,36.533 h0.8 r210
S24: Top Overlay "+" at -12.128,39.17 h0.8 r195; Top Overlay "-" at -10.414,39.642 h0.8 r195; Top Overlay "O" at -8.569,40.117 h0.8 r195